# Altium PCB rsx_low_power_board.PcbDoc
Units mil, origin at the board's own origin, x right, y up, seen from the top; angles counter-clockwise.
Board outline 6000 x 4000 mil, 2 copper layers (Top Layer, Bottom Layer); 43 components, 15 nets, 113 pads, 16 vias.
Unrouted connection lines stored in the file: 14.
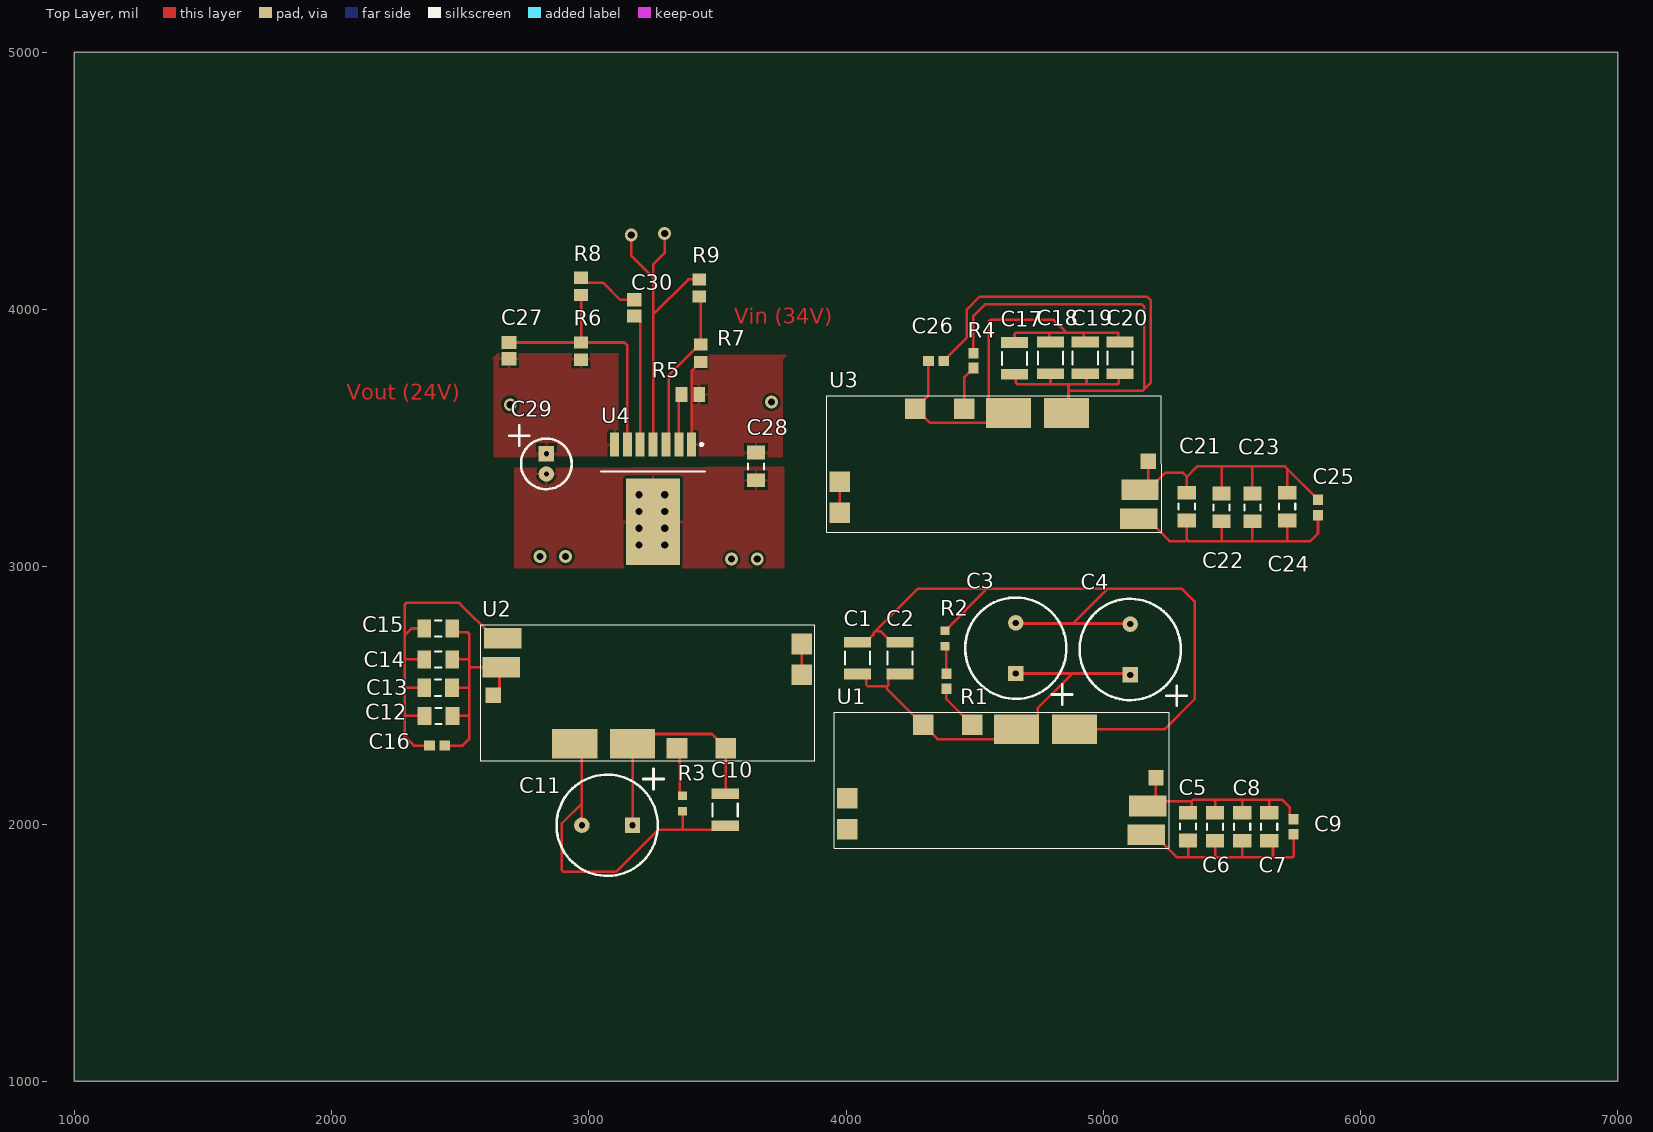
[diagram p0: Top Layer view]
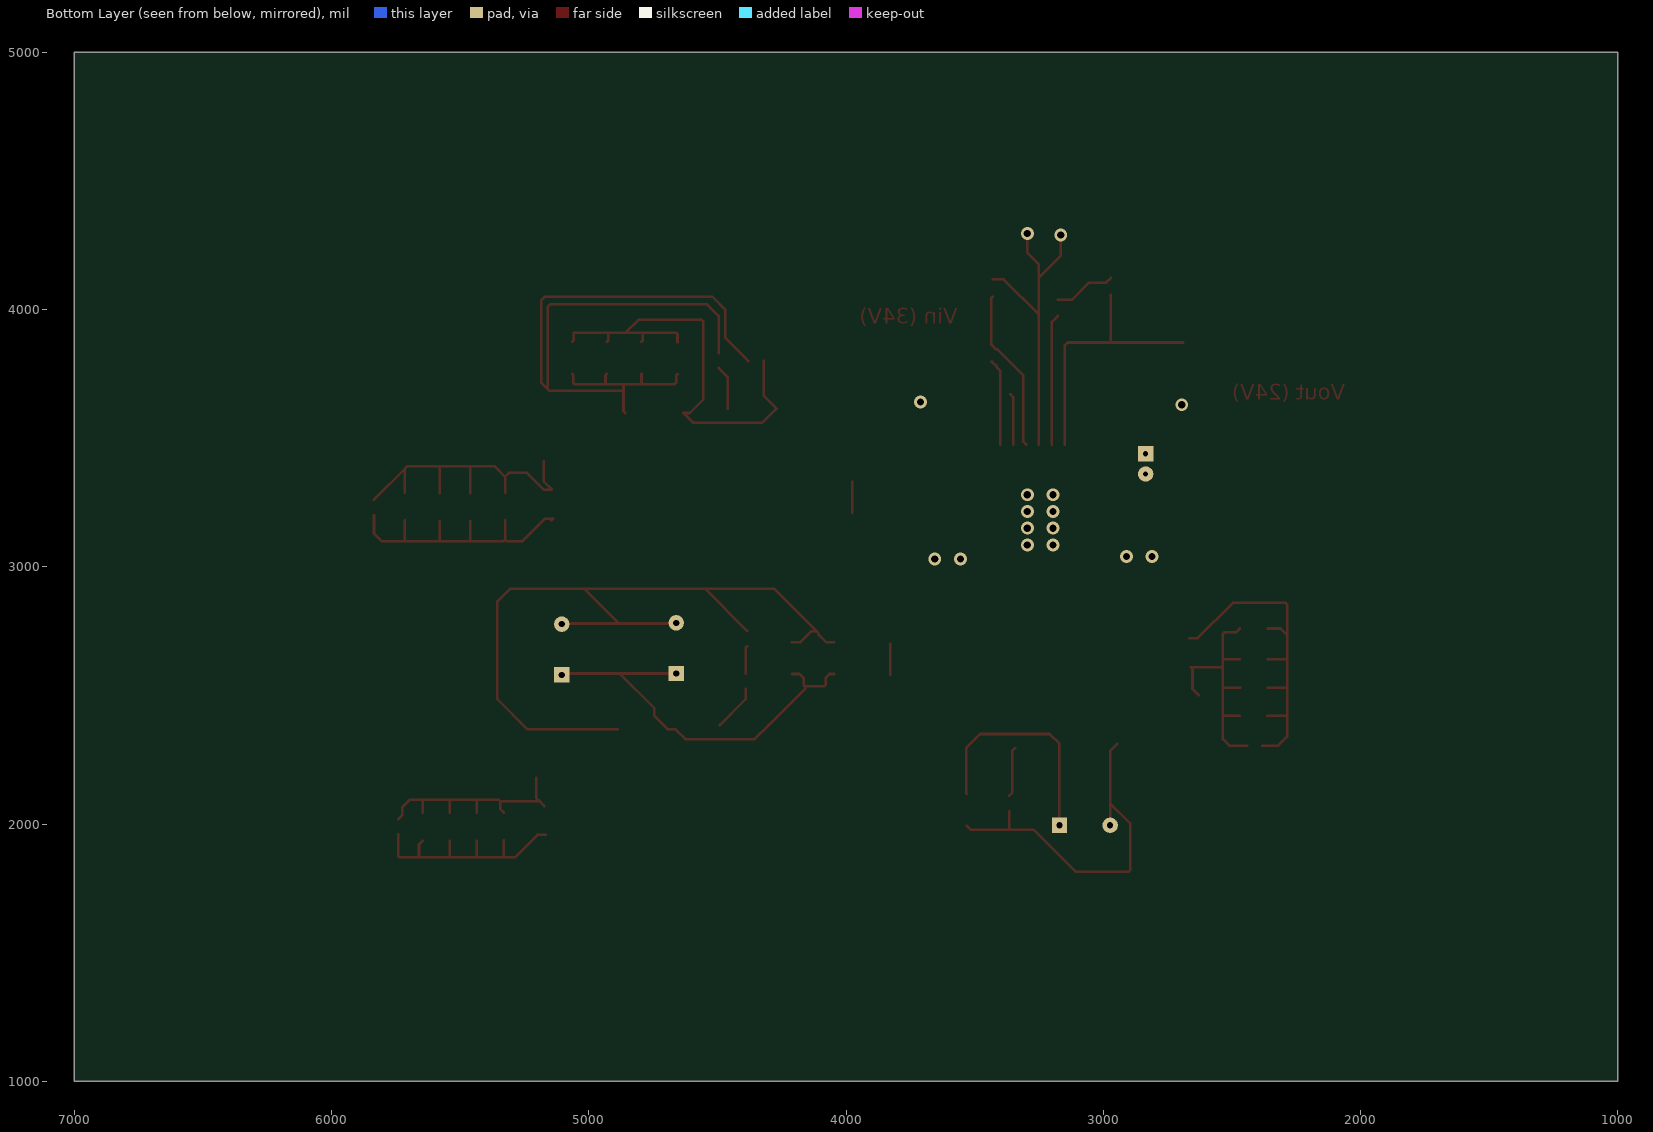
[diagram p1: Bottom Layer view, seen from below]

## Layer stack, top to bottom
Top Solder: solder mask 0.4, Solder Resist, Dk 3.5
Top Layer: signal copper 1.4
Dielectric 1: dielectric 12.6, FR-4, Dk 4.8
Bottom Layer: signal copper 1.4
Bottom Solder: solder mask 0.4, Solder Resist, Dk 3.5

## Board outline
1000,1000 7000,1000 7000,5000 1000,5000

## Design rules (kind name [scope] priority, off if disabled: settings)
Clearance [All] p1: gap=10 ignorepadtopadclearanceinfootprint=FALSE except(0: Arc-Hole Track-Hole SMDPad-Hole THPad-Hole Via-Hole Fill-Hole Poly-Hole Region-Hole Text-Hole)
PolygonConnect [All] p1: connectstyle=Relief reliefconductorwidth=10 reliefentries=4 polygonreliefangle="90 Angle" airgapwidth=10
RoutingVias [All] p1: holewidth=28 width=50 viastyle="Through Hole" minholewidth=28 minwidth=50 maxholewidth=28 maxwidth=50
SolderMaskExpansion [All] p1: expansion=4 istentingtop=FALSE
Width [All] p1: maxlimit=10 minlimit=10 preferedwidth=10
30 further rules are at their usual default settings.

## Components (designator, comment, footprint, x,y, rotation, side; value= is the part's Value field where it differs from the comment)
C1 "22uF" "22uF Capacitor" 4045,2645 r270 top
C2 "22uF" "22uF Capacitor" 4210,2645 r270 top
C3 "330uF" "330uF throught hole" 4660,2683.43 r270 top
C4 "330uF" "330uF throught hole" 5105,2678.43 r270 top
C5 "10uf" "10uF capacitor LPB" 5330,1990 r270 top
C6 "10uf" "10uF capacitor LPB" 5435,1989.13 r270 top
C7 "10uf" "10uF capacitor LPB" 5645,1989.13 r270 top
C8 "10uf" "10uF capacitor LPB" 5540,1989.13 r270 top
C9 "0.01uF" "0.01uF capacitor" 5740,1989.53 r270 top
C10 "22uF" "22uF Capacitor" 3530,2055 r90 top
C11 "330uF" "330uF throught hole" 3071.57,1995 r0 top
C12 "10uf" "10uF capacitor LPB" 2415.87,2420 r180 top
C13 "10uf" "10uF capacitor LPB" 2414.13,2530 r180 top
C14 "10uf" "10uF capacitor LPB" 2415,2640 r180 top
C15 "10uf" "10uF capacitor LPB" 2415,2760 r180 top
C16 "0.01uF" "0.01uF capacitor" 2410.47,2305 r180 top
C17 "22uF" "22uF Capacitor" 4655,3810 r90 top
C18 "22uF" "22uF Capacitor" 4795,3812.01 r90 top
C19 "22uF" "22uF Capacitor" 4930,3812.01 r90 top
C20 "22uF" "22uF Capacitor" 5065,3812.01 r90 top
C21 "10uf" "10uF capacitor LPB" 5325,3234.13 r270 top
C22 "10uf" "10uF capacitor LPB" 5460,3230.87 r270 top
C23 "10uf" "10uF capacitor LPB" 5580,3230.87 r270 top
C24 "10uf" "10uF capacitor LPB" 5715,3234.13 r270 top
C25 "0.01uF" "0.01uF capacitor" 5835,3230.47 r270 top
C26 "0.01uF" "0.01uF capacitor" 4350,3800 r180 top
C27 "0.022uF" "0.022uF Ceramic" 2690,3840 r270 top
C28 "10uf" "10uF capacitor LPB" 3650,3390 r270 top
C29 "33uF" "33uF Through hole Radical" 2835,3400 r90 top
C30 "4700 pF" "4700uF 0805" 3176.63,4006.5 r270 top
R1 "26.7KR" "26.7KR Resistor" 4390,2555 r270 top
R2 "16.2 KOhm" "16.2 KOhm Resistor" 4385,2721.46 r270 top
R3 "16.2 KOhm" "16.2 KOhm Resistor" 3365,2080 r90 top
R4 "6.19 KOhm" "6.19KOhm Resistor" 4495,3801.46 r270 top
R5 "499 KOhm" "499KOhm RG2012" 3395,3670 r180 top
R6 "34KOhm" "34 KOhm Resistor ERA-6A" 2970,3838.46 r270 top
R7 "1.18 KOhm" "34 KOhm Resistor ERA-6A" 3435,3830 r90 top
R8 "1.18 KOhm" "34 KOhm Resistor ERA-6A" 2970,4090 r270 top
R9 "1.18 KOhm" "34 KOhm Resistor ERA-6A" 3430,4083.46 r270 top
U1 "APXW012A0X3-SRZ_1" "DC-DC Buck converter" 3954.96,1905.08 r0 top
U2 "APXW012A0X3-SRZ_1" "DC-DC Buck converter" 3878.11,2774.96 r180 top
U3 "APXW012A0X3-SRZ_1" "DC-DC Buck converter" 3924.96,3135.08 r0 top
U4 "LMZ14203HTZX/NOPB" "24V DC to DC buck" 3256,3259.76 r270 top

## Footprints (in the part's own frame and the unit in brackets; to place one, negate y for a bottom-side part, rotate by r counter-clockwise, add the part's x,y. Pads: shape width x height; smd on the part's side, far side on the other; paste and mask are expansions set on the pad)
"0.01uF capacitor" [mm] "Chip Capacitor, 2-Leads, Body 1,60x0,80mm, IPC Medium Density"
  rect 1.05x1 smd: 1(-0.75,0) 2(0.75,0)
  body extent -0.88,-0.48 0.87,0.47, height 0.87
"0.022uF Ceramic" [mm] "Chip Capacitor, 2-Leads, Body 2,00x1,25mm, IPC Medium Density"
  rect 1.3x1.45 smd: 1(-0.8,0) 2(0.8,0)
  body extent -1.1,-0.72 1.1,0.72, height 0.88
"6.19KOhm Resistor" [mm] "Chip Resistor, 2-Leads, Body 1,60x0,80mm, IPC Medium Density"
  rect 1.05x1 smd: 1(-0.725,0) 2(0.725,0)
  body extent -0.9,-0.5 0.9,0.5, height 0.55
"10uF capacitor LPB" [mm] "Chip Capacitor, 2-Leads, Body 3,20x1,60mm, IPC Medium Density"
  rect 1.35x1.8 smd: 1(-1.375,0) 2(1.375,0)
  silkscreen extent -0.3,-0.8 0.3,0.8, body extent -1.7,-0.9 1.7,0.9, height 1.8
"16.2 KOhm Resistor" [mm] "Chip Resistor, 2-Leads, Body 1,60x0,80mm, IPC Medium Density"
  rect 0.85x0.9 smd: 1(-0.775,0) 2(0.775,0)
  body extent -0.85,-0.45 0.85,0.45, height 0.55
"22uF Capacitor" [mm] "Chip Capacitor, 2-Leads, Body 3,20x2,50mm, IPC Medium Density"
  rect 1.05x2.7 smd: 1(-1.575,0) 2(1.575,0)
  silkscreen extent -0.65,-1.25 0.65,1.25, body extent -1.75,-1.35 1.75,1.35, height 2.7
"24V DC to DC buck" [mm]
  rrect11% 2.41x0.89 smd: 1(-5.477,3.658) 2(-5.477,2.388) 3(-5.477,1.118) 4(-5.477,-0.152) 5(-5.477,-1.422) 6(-5.477,-2.692) 7(-5.477,-3.962)
  rrect2% 8.54x5.35 smd: 8(2.153,-0.152)
  silkscreen extent -5.6,-5.3 -2.83,5, body extent -2.68,-5.35 7.42,5.05, height 4.67
"26.7KR Resistor" [mm] "Chip Resistor, 2-Leads, Body 1,60x0,80mm, IPC Medium Density"
  rect 1.05x1 smd: 1(-0.725,0) 2(0.725,0)
  body extent -0.9,-0.5 0.9,0.5, height 0.55
"33uF Through hole Radical" [mil]
  rect 60x60 hole 19.68: 1(39.37,0)
  round 60 hole 19.68: 2(-39.37,0)
  silkscreen extent -98,-98 149,144
"34 KOhm Resistor ERA-6A" [mm] "Chip Resistor, 2-Leads, Body 2,00x1,25mm, IPC Medium Density"
  rect 1.2x1.35 smd: 1(-0.85,0) 2(0.85,0)
  body extent -1.1,-0.67 1.1,0.67, height 0.6
"330uF throught hole" [mil]
  rect 60x60 hole 23.62: 1(98.43,0)
  round 60 hole 23.62: 2(-98.43,0)
  silkscreen extent -197,-197 219,219
"499KOhm RG2012" [mm] "Chip Resistor, 2-Leads, Body 2,00x1,25mm, IPC Medium Density"
  rect 1.15x1.45 smd: 1(-0.875,0) 2(0.875,0)
  body extent -1.1,-0.72 1.1,0.72, height 0.5
"4700uF 0805" [mm] "Chip Capacitor, 2-Leads, Body 2,00x1,25mm, IPC Medium Density"
  rect 1.3x1.45 smd: 1(-0.8,0) 2(0.8,0)
  body extent -1.1,-0.72 1.1,0.72, height 0.88
"DC-DC Buck converter" [mm]
  rect 2.03x2.03 smd: 1(1.27,1.91) 2(1.27,4.95) 3(8.76,12.19) 4(13.59,12.19)
  rect 4.45x2.92 smd: 2(23.69,11.75) 5(17.97,11.75)
  rect 3.68x2.03 smd: 2(30.94,4.19) 7(30.8,1.33)
  rect 1.52x1.52 smd: 6(31.75,6.99)
  silkscreen extent 0,0 33.02,13.46, body extent 0.08,-0.01 33.1,13.44, height 10

## Part data
C1 C2 C10 C17 C18 C19 C20: library part GRM32ER71E226KE15L, "Cap Ceramic 22uF 25V X7R 10% SMD 1210 125C Embossed T/R", Case/Package=1210, Case Code (Metric)=3225, Dielectric=X7R, Manufacturer 1=Murata, Max Operating Temperature=125°C, Min Operating Temperature=-55°C, Package Quantity=1, Supplier Part Number 1=490-5313-6-ND, Tolerance=10%, Voltage=25V, Capacitance=22uF, Case Code (Imperial)=1210, Category=Capacitor, ComponentLink1Description=https://datasheet.ciiva.com/6072/1697714-6072768.pdf?src-supplier=Farnell, ComponentLink1URL=https://datasheet.ciiva.com/6072/1697714-6072768.pdf?src-supplier=Farnell, ComponentLink2Description=https://datasheet.ciiva.com/16497/product-16497009.pdf?src-supplier=Future+Electronics, ComponentLink2URL=https://datasheet.ciiva.com/16497/product-16497009.pdf?src-supplier=Future+Electronics, ComponentLink3Description=https://datasheet.ciiva.com/3776/2741grm32er71e226ke1523-3776996.pdf?src-supplier=Arrow, ComponentLink3URL=https://datasheet.ciiva.com/3776/2741grm32er71e226ke1523-3776996.pdf?src-supplier=Arrow, ComponentLink4Description=https://datasheet.ciiva.com/11789/0900766b80ef921d-11789129.pdf?src-supplier=RSComponents, ComponentLink4URL=https://datasheet.ciiva.com/11789/0900766b80ef921d-11789129.pdf?src-supplier=RSComponents, ComponentLink5Description=https://datasheet.ciiva.com/29201/451826-da-01-de-vs-kondens-grm32-er71e-226ke15l-29201795.pdf?src-supplier=Conrad, ComponentLink5URL=https://datasheet.ciiva.com/29201/451826-da-01-de-vs-kondens-grm32-er71e-226ke15l-29201795.pdf?src-supplier=Conrad, ComponentLink6Description=https://datasheet.ciiva.com/175/partnumbering-e-01-175746.pdf?src-supplier=Digi-Key, ComponentLink6URL=https://datasheet.ciiva.com/175/partnumbering-e-01-175746.pdf?src-supplier=Digi-Key, ComponentLink7Description=https://datasheet.ciiva.com/175/partnumbering-e-01-175747.pdf?src-supplier=Digi-Key, ComponentLink7URL=https://datasheet.ciiva.com/175/partnumbering-e-01-175747.pdf?src-supplier=Digi-Key, ComponentLink8Description=https://datasheet.ciiva.com/175/partnumbering-e-01-175748.pdf?src-supplier=Digi-Key, ComponentLink8URL=https://datasheet.ciiva.com/175/partnumbering-e-01-175748.pdf?src-supplier=Digi-Key, ComponentLink9Description=https://datasheet.ciiva.com/22703/1697714-22703397.pdf?src-supplier=Element14, ComponentLink9URL=https://datasheet.ciiva.com/22703/1697714-22703397.pdf?src-supplier=Element14, Depth=2.5mm, Height=2.5mm, Lead Free="Lead Free", Length=3.2mm, Manufacturer Part Number 1=GRM32ER71E226KE15L, Material=Ceramic, Mount="Surface Mount", Number of Pins=2, Packaging="Tape and Reel", Pricing 1="1=1,78000, 10=1,40600, 100=1,05410, 500=0,79646 (USD)", Radiation Hardening=No, REACH SVHC="No SVHC", RoHS=Yes, Stock 1=52660, Supplier 1=Digi-Key, Termination=SMD/SMT, Thickness=0.106inch, Voltage Rating=25V, Voltage Rating (DC)=25V, Width=0.098inch
C3 C4 C11: library part 35ZLH330MEFCT810X12.5, "CAP ALUM 330UF 20% 35V RADIAL", Case/Package=Radial, Manufacturer 1=Rubycon, Max Operating Temperature=105°C, Min Operating Temperature=-40°C, Package Quantity=1000, Ripple Current=731.5mA, Supplier Part Number 1=1189-3752-1-ND, Tolerance=20%, Voltage Rating=35V, Capacitance=330uF, ComponentLink1Description=http://www.rubycon.co.jp/en/catalog/e_pdfs/aluminum/e_ZLH.pdf?src-supplier=Digi-Key, ComponentLink1URL=http://www.rubycon.co.jp/en/catalog/e_pdfs/aluminum/e_ZLH.pdf?src-supplier=Digi-Key, ComponentLink2Description=http://www.rubycon.co.jp/en/catalog/e_pdfs/aluminum/Radial_Lead_Alumi_Eng.pdf?src-supplier=Digi-Key, ComponentLink2URL=http://www.rubycon.co.jp/en/catalog/e_pdfs/aluminum/Radial_Lead_Alumi_Eng.pdf?src-supplier=Digi-Key, Height - Seated (Max)=0.551inch, Impedance=39mR, Lead Pitch=0.197inch, Life (Hours)=10000Hour, Manufacturer Part Number 1=35ZLH330MEFCT810X12.5, Mount="Through Hole", Packaging="Tape and Reel", Pricing 1="1=0,52000, 10=0,36900, 100=0,24280 (USD)", RoHS=Yes, Stock 1=14330, Supplier 1=Digi-Key
C5 C6 C7 C8 C12 C13 C14 C15 C21 C22 C23 C24 C28: library part GRT31CR61H106ME01L, "CAP CER 10UF 50V X5R 1206", Capacitance=10uF, Case/Package=1206, Case Code (Metric)=3216, Manufacturer 1=Murata, Max Operating Temperature=85°C, Min Operating Temperature=-55°C, Ratings=AEC-Q200, Supplier Part Number 1=490-12457-1-ND, Tolerance=20%, Voltage Rating=50V, Case Code (Imperial)=1206, Category=Capacitor, ComponentLink1Description=http://search.murata.co.jp/Ceramy/image/img/A01X/G101/ENG/GRT31CR61H106ME01-01.pdf?src-supplier=Digi-Key, ComponentLink1URL=http://search.murata.co.jp/Ceramy/image/img/A01X/G101/ENG/GRT31CR61H106ME01-01.pdf?src-supplier=Digi-Key, Length=0.126inch, Manufacturer Part Number 1=GRT31CR61H106ME01L, Mount="Surface Mount", Packaging="Tape and Reel", Pricing 1="1=0,50000, 10=0,34900, 100=0,20920, 500=0,15690, 1000=0,13249 (USD)", RoHS=Yes, Stock 1=8159, Supplier 1=Digi-Key, Thickness=0.071inch, Width=0.063inch
C9 C16 C25 C26: library part C0603C103KARACAUTO, "Cap Ceramic 0.01uF 250V X7R 10% Pad SMD 0603 125C Automotive T/R", Capacitance=10nF, Case/Package=0603, Case Code (Metric)=1608, Manufacturer 1=KEMET, Max Operating Temperature=125°C, Min Operating Temperature=-55°C, Ratings=AEC-Q200, Supplier Part Number 1=399-17960-1-ND, Tolerance=10%, Voltage Rating=250V, Case Code (Imperial)=0603, Category=Capacitor, ComponentLink1Description=https://api.kemet.com/component-edge/download/datasheet/C0603C103KARACAUTO.pdf?src-supplier=Digi-Key, ComponentLink1URL=https://api.kemet.com/component-edge/download/datasheet/C0603C103KARACAUTO.pdf?src-supplier=Digi-Key, Manufacturer Part Number 1=C0603C103KARACAUTO, Mount="Surface Mount", Packaging="Tape and Reel", Pricing 1="1=0,90000, 10=0,68500, 100=0,49040, 500=0,37964, 1000=0,32691 (USD)", RoHS=No, Stock 1=8483, Supplier 1=Digi-Key
C27: library part "0.022uF C0805C223K5RACTU", "KEMET - C0805C223K5RACTU - CAP, MLCC, X7R, 22NF, 50V, 0805", Capacitance=22nF, Case/Package=0805, Dielectric=X7R, Dielectric Material=Ceramic, Manufacturer 1=KEMET, Manufacturer Part Number 1=C0805C223K5RACTU, Max Operating Temperature=125°C, Min Operating Temperature=-55°C, Supplier Part Number 1=399-1163-1-ND, Tolerance=10%, Voltage=50V, ComponentLink1Description=https://datasheet.ciiva.com/18193/getdatasheetpartid-385695-18193669.pdf?src-supplier=Verical, ComponentLink1URL=https://datasheet.ciiva.com/18193/getdatasheetpartid-385695-18193669.pdf?src-supplier=Verical, Depth=1.25mm, Height=0.78mm, Length=2mm, Mount="Surface Mount", Packaging="Tape and Reel", Pricing 1="1=0,10000, 10=0,06000, 100=0,02670, 500=0,01906, 1000=0,01497 (USD)", Radiation Hardening=No, RoHS=Yes, Stock 1=516153, Supplier 1=Digi-Key, Voltage Rating (DC)=50V
C29: library part "33uF UFW1H330MDD1TD", "CAP ALUM 33UF 20% 50V RADIAL", Case/Package=Radial, Manufacturer 1=Nichicon, Manufacturer Part Number 1=UFW1H330MDD1TD, Max Operating Temperature=85°C, Min Operating Temperature=-40°C, Package Quantity=1, Ripple Current=120mA, Supplier Part Number 1=493-11010-1-ND, Tolerance=20%, Voltage Rating=50V, Capacitance=33uF, ComponentLink1Description=http://nichicon-us.com/english/products/pdfs/e-ufw.pdf?src-supplier=Digi-Key, ComponentLink1URL=http://nichicon-us.com/english/products/pdfs/e-ufw.pdf?src-supplier=Digi-Key, ComponentLink2Description=http://nichicon-us.com/english/products/pdfs/e-mi_tape.pdf?src-supplier=Digi-Key, ComponentLink2URL=http://nichicon-us.com/english/products/pdfs/e-mi_tape.pdf?src-supplier=Digi-Key, Height - Seated (Max)=0.492inch, Lead Pitch=0.079inch, Life (Hours)=2000Hour, Mount="Through Hole", Packaging="Tape and Reel", Pricing 1="1=0,23000, 10=0,16000, 100=0,09070, 500=0,06404, 1000=0,05603 (USD)", RoHS=Yes, Stock 1=4144, Supplier 1=Digi-Key
C30: library part "4700pF 0805", "KEMET - C0805C472K5RACTU - CERAMIC CAPACITOR 4700PF, 50V, X7R, 10%, 0805", Capacitance=4.7nF, Case/Package=0805, Case Code (Metric)=2012, Dielectric=X7R, Dielectric Material=Ceramic, Manufacturer 1=KEMET, Manufacturer Part Number 1=C0805C472K5RACTU, Max Operating Temperature=125°C, Min Operating Temperature=-55°C, Package Quantity=1, Supplier Part Number 1=399-1155-1-ND, Tolerance=10%, Voltage=50V, Case Code (Imperial)=0805, ComponentLink1Description=https://datasheet.ciiva.com/6074/kem-c1002-x7r-smd-6074679.pdf?src-supplier=Farnell, ComponentLink1URL=https://datasheet.ciiva.com/6074/kem-c1002-x7r-smd-6074679.pdf?src-supplier=Farnell, ComponentLink2Description=https://datasheet.ciiva.com/28682/1851736-28682318.pdf?src-supplier=Element14, ComponentLink2URL=https://datasheet.ciiva.com/28682/1851736-28682318.pdf?src-supplier=Element14, Contact Plating=Tin,Matte, Depth=1.25mm, Height=0.78mm, Length=2mm, Mount="Surface Mount", Number of Pins=2, Packaging="Tape and Reel", Pricing 1="1=0,10000, 10=0,06800, 100=0,03040, 500=0,02172, 1000=0,01706 (USD)", Radiation Hardening=No, REACH SVHC="No SVHC", RoHS=Yes, Stock 1=374666, Supplier 1=Digi-Key, Termination=SMD/SMT, Thickness=0.035inch, Voltage Rating=50V, Voltage Rating (DC)=50V, Weight=0.000194oz, Width=0.049inch
R1: library part ERA-3AEB2672V, "RES SMD 26.7KOHM 0.1% 1/10W 0603", Case/Package=0603, Case Code (Metric)=1608, Manufacturer 1=Panasonic, Max Operating Temperature=155°C, Max Power Dissipation=100mW, Min Operating Temperature=-55°C, Package Quantity=1, Resistance=26.7kR, Supplier Part Number 1=P26.7KDBCT-ND, Temperature Coefficient=25ppm/°C, Tolerance=0.1%, Voltage Rating=75V, Case Code (Imperial)=0603, ComponentLink1Description=https://datasheet.ciiva.com/11814/0900766b80eb1d8c-11814836.pdf?src-supplier=RSComponents, ComponentLink1URL=https://datasheet.ciiva.com/11814/0900766b80eb1d8c-11814836.pdf?src-supplier=RSComponents, ComponentLink2Description=https://datasheet.ciiva.com/5987/485442-5987192.pdf?src-supplier=Farnell, ComponentLink2URL=https://datasheet.ciiva.com/5987/485442-5987192.pdf?src-supplier=Farnell, ComponentLink3Description=https://datasheet.ciiva.com/5987/485442-5987183.pdf?src-supplier=Farnell, ComponentLink3URL=https://datasheet.ciiva.com/5987/485442-5987183.pdf?src-supplier=Farnell, ComponentLink4Description=https://datasheet.ciiva.com/46422/485442-46422629.pdf?src-supplier=Element14, ComponentLink4URL=https://datasheet.ciiva.com/46422/485442-46422629.pdf?src-supplier=Element14, ComponentLink5Description=https://datasheet.ciiva.com/17210/aoa0000ce26-17210681.pdf?src-supplier=Avnet+Europe, ComponentLink5URL=https://datasheet.ciiva.com/17210/aoa0000ce26-17210681.pdf?src-supplier=Avnet+Europe, Composition="Thin Film,Metal Film", Contact Plating=Tin, Depth=0.8mm, Features="Automotive AEC-Q200", Height=0.45mm, Lead Free="Lead Free", Length=1.6mm, Manufacturer Part Number 1=ERA-3AEB2672V, Mount="Surface Mount", Number of Pins=2, Number of Terminations=2, Packaging="Tape and Reel", Power Rating=100mW, Pricing 1="1=0,35000, 10=0,30000, 100=0,11720, 1000=0,04906, 2500=0,04498 (USD)", Radiation Hardening=No, REACH SVHC="No SVHC", RoHS=Yes, Stock 1=17260, Supplier 1=Digi-Key, Voltage Rating (DC)=75V, Width=0.8mm
R2 R3: library part RT0603DRD0716K2L, "RES SMD 16.2KOHM 0.5% 1/10W 0603", Case/Package=0603, Case Code (Metric)=1608, Manufacturer 1=Yageo, Max Operating Temperature=155°C, Max Power Dissipation=100mW, Min Operating Temperature=-55°C, Package Quantity=1, Resistance=16.2kR, Supplier Part Number 1=311-16.2KDCT-ND, Temperature Coefficient=25ppm/°C, Tolerance=0.5%, Voltage Rating (DC)=50V, Case Code (Imperial)=0603, Category=Resistors, ComponentLink1Description=http://www.yageo.com/documents/recent/PYu-RT_1-to-0.01_RoHS_L_8.pdf?src-supplier=Digi-Key, ComponentLink1URL=http://www.yageo.com/documents/recent/PYu-RT_1-to-0.01_RoHS_L_8.pdf?src-supplier=Digi-Key, Composition="Thin Film", Features="Moisture Resistant", Height=0.022inch, Lead Free="Lead Free", Length=0.063inch, Manufacturer Part Number 1=RT0603DRD0716K2L, Number of Terminations=2, Packaging="Tape and Reel", Pricing 1="1=0,20000, 10=0,16800, 100=0,06570, 1000=0,02750, 2500=0,02521 (USD)", RoHS=Yes, Stock 1=8163, Supplier 1=Digi-Key, Width=0.031inch
R4: library part ERA3AEB6191V, "RES SMD 6.19KOHM 0.1% 1/10W 0603", Case/Package=0603, Case Code (Metric)=1608, Manufacturer 1=Panasonic, Max Operating Temperature=155°C, Max Power Dissipation=100mW, Min Operating Temperature=-55°C, Package Quantity=1, Resistance=6.19kR, Supplier Part Number 1=P6.19KDBCT-ND, Temperature Coefficient=25ppm/°C, Tolerance=0.1%, Voltage Rating=75V, Case Code (Imperial)=0603, ComponentLink1Description=https://datasheet.ciiva.com/11809/0900766b80eb1d8c-11809038.pdf?src-supplier=RSComponents, ComponentLink1URL=https://datasheet.ciiva.com/11809/0900766b80eb1d8c-11809038.pdf?src-supplier=RSComponents, ComponentLink2Description=https://datasheet.ciiva.com/5971/485442-5971798.pdf?src-supplier=Farnell, ComponentLink2URL=https://datasheet.ciiva.com/5971/485442-5971798.pdf?src-supplier=Farnell, ComponentLink3Description=https://datasheet.ciiva.com/24026/aoa0000ce26-32660-24026983.pdf?src-supplier=Mouser, ComponentLink3URL=https://datasheet.ciiva.com/24026/aoa0000ce26-32660-24026983.pdf?src-supplier=Mouser, ComponentLink4Description=https://datasheet.ciiva.com/46447/485442-46447114.pdf?src-supplier=Element14, ComponentLink4URL=https://datasheet.ciiva.com/46447/485442-46447114.pdf?src-supplier=Element14, ComponentLink5Description=https://datasheet.ciiva.com/43457/485442-43457243.pdf?src-supplier=Farnell, ComponentLink5URL=https://datasheet.ciiva.com/43457/485442-43457243.pdf?src-supplier=Farnell, ComponentLink6Description=https://datasheet.ciiva.com/46447/485442-46447115.pdf?src-supplier=Element14, ComponentLink6URL=https://datasheet.ciiva.com/46447/485442-46447115.pdf?src-supplier=Element14, ComponentLink7Description=https://datasheet.ciiva.com/41450/001180853-da-01-en-widerstand-era-0603-6k19-0-1-5000st-41450170.pdf?src-supplier=Conrad, ComponentLink7URL=https://datasheet.ciiva.com/41450/001180853-da-01-en-widerstand-era-0603-6k19-0-1-5000st-41450170.pdf?src-supplier=Conrad, Composition="Metal Film,Thin Film", Contact Plating=Tin, Depth=0.8mm, Features="Automotive AEC-Q200", Height=0.45mm, Lead Free="Lead Free", Length=1.6mm, Manufacturer Part Number 1=ERA3AEB6191V, Military Standard=Not, Mount="Surface Mount", Number of Pins=2, Number of Terminations=2, Packaging="Tape and Reel", Power Rating=100mW, Pricing 1="1=0,35000, 10=0,30000, 100=0,11720, 1000=0,04906, 2500=0,04498 (USD)", Radiation Hardening=No, REACH SVHC="No SVHC", RoHS=Yes, Stock 1=26110, Supplier 1=Digi-Key, Voltage Rating (DC)=75V, Width=0.8mm
R5: library part RG2012P-4993-B-T5, "RES SMD 499K OHM 0.1% 1/8W 0805", Case/Package=0805, Case Code (Metric)=2012, Manufacturer 1=Susumu, Max Operating Temperature=155°C, Min Operating Temperature=-55°C, Power Rating=125mW, Resistance=499kR, Supplier Part Number 1=RG20P499KBCT-ND, Temperature Coefficient=25ppm/°C, Tolerance=0.1%, Voltage Rating=150V, Case Code (Imperial)=0805, ComponentLink1Description=https://datasheet.ciiva.com/5624/rg-rm-rgh-datasheet-5624071.pdf?src-supplier=Mouser, ComponentLink1URL=https://datasheet.ciiva.com/5624/rg-rm-rgh-datasheet-5624071.pdf?src-supplier=Mouser, Composition="Thin Film", Height=0.4mm, Lead Free="Lead Free", Length=2mm, Manufacturer Part Number 1=RG2012P-4993-B-T5, Packaging="Tape and Reel", Pricing 1="1=0,41000, 10=0,31800, 100=0,13360, 1000=0,07374, 2500=0,06913 (USD)", RoHS=Yes, Stock 1=27646, Supplier 1=Digi-Key, Termination=SMD/SMT, Voltage Rating (DC)=150V, Weight=0.000194oz, Width=1.2mm
R6: library part ERA6AEB3402V, "RES SMD 34K OHM 0.1% 1/8W 0805", Case/Package=0805, Case Code (Metric)=2012, Manufacturer 1=Panasonic, Max Operating Temperature=155°C, Max Power Dissipation=125mW, Min Operating Temperature=-55°C, Package Quantity=5000, Resistance=34kR, Supplier Part Number 1=P34KDACT-ND, Temperature Coefficient=25ppm/°C, Tolerance=0.1%, Voltage Rating=200V, Voltage Rating (DC)=100V, Case Code (Imperial)=0805, ComponentLink1Description=https://datasheet.ciiva.com/11815/0900766b80eb1d8c-11815791.pdf?src-supplier=RSComponents, ComponentLink1URL=https://datasheet.ciiva.com/11815/0900766b80eb1d8c-11815791.pdf?src-supplier=RSComponents, ComponentLink2Description=https://datasheet.ciiva.com/41450/001181326-da-01-en-widerstand-era-0805-34k0-0-1-5000st-41450489.pdf?src-supplier=Conrad, ComponentLink2URL=https://datasheet.ciiva.com/41450/001181326-da-01-en-widerstand-era-0805-34k0-0-1-5000st-41450489.pdf?src-supplier=Conrad, ComponentLink3Description=https://datasheet.ciiva.com/9190/aoa0000ce26-9190487.pdf?src-supplier=Avnet, ComponentLink3URL=https://datasheet.ciiva.com/9190/aoa0000ce26-9190487.pdf?src-supplier=Avnet, ComponentLink4Description=https://datasheet.ciiva.com/17210/aoa0000ce26-17210191.pdf?src-supplier=Avnet+Europe, ComponentLink4URL=https://datasheet.ciiva.com/17210/aoa0000ce26-17210191.pdf?src-supplier=Avnet+Europe, ComponentLink5Description=https://datasheet.ciiva.com/22705/485442-22705221.pdf?src-supplier=Element14, ComponentLink5URL=https://datasheet.ciiva.com/22705/485442-22705221.pdf?src-supplier=Element14, ComponentLink6Description=https://datasheet.ciiva.com/6052/485442-6052790.pdf?src-supplier=Farnell, ComponentLink6URL=https://datasheet.ciiva.com/6052/485442-6052790.pdf?src-supplier=Farnell, ComponentLink7Description=https://datasheet.ciiva.com/7870/485442-7870667.pdf?src-supplier=Element14, ComponentLink7URL=https://datasheet.ciiva.com/7870/485442-7870667.pdf?src-supplier=Element14, ComponentLink8Description=https://datasheet.ciiva.com/7870/485442-7870668.pdf?src-supplier=Element14, ComponentLink8URL=https://datasheet.ciiva.com/7870/485442-7870668.pdf?src-supplier=Element14, Composition="Metal Film,Thin Film", Contact Plating=Tin, Depth=1.25mm, Features="Automotive AEC-Q200", Height=0.5mm, Lead Free="Lead Free", Length=2mm, Manufacturer Part Number 1=ERA6AEB3402V, Military Standard=Not, Mount="Surface Mount", Number of Pins=2, Number of Terminations=2, Packaging="Tape and Reel", Power Rating=125mW, Pricing 1="1=0,36000, 10=0,30200, 100=0,11820, 1000=0,04948, 2500=0,04536 (USD)", Radiation Hardening=No, REACH SVHC="No SVHC", RoHS=Yes, Stock 1=7057, Supplier 1=Digi-Key, Termination=SMD/SMT, Width=1.25mm
R7 R8 R9: library part ERA-6AEB1181V, "RES SMD 1.18K OHM 0.1% 1/8W 0805", Case/Package=0805, Case Code (Metric)=2012, Manufacturer 1=Panasonic, Max Operating Temperature=155°C, Max Power Dissipation=125mW, Min Operating Temperature=-55°C, Package Quantity=1, Resistance=1.18kR, Supplier Part Number 1=P1.18KDACT-ND, Temperature Coefficient=25ppm/°C, Tolerance=0.1%, Voltage Rating=100V, Case Code (Imperial)=0805, ComponentLink1Description=https://datasheet.ciiva.com/11811/0900766b80eb1d8c-11811515.pdf?src-supplier=RSComponents, ComponentLink1URL=https://datasheet.ciiva.com/11811/0900766b80eb1d8c-11811515.pdf?src-supplier=RSComponents, ComponentLink2Description=https://datasheet.ciiva.com/26335/459360-da-01-en-widerstand-0805-era-26335818.pdf?src-supplier=Conrad, ComponentLink2URL=https://datasheet.ciiva.com/26335/459360-da-01-en-widerstand-0805-era-26335818.pdf?src-supplier=Conrad, ComponentLink3Description=https://datasheet.ciiva.com/7911/485442-7911589.pdf?src-supplier=Element14, ComponentLink3URL=https://datasheet.ciiva.com/7911/485442-7911589.pdf?src-supplier=Element14, ComponentLink4Description=https://datasheet.ciiva.com/7911/485442-7911590.pdf?src-supplier=Element14, ComponentLink4URL=https://datasheet.ciiva.com/7911/485442-7911590.pdf?src-supplier=Element14, ComponentLink5Description=https://datasheet.ciiva.com/5870/485442-5870600.pdf?src-supplier=Farnell, ComponentLink5URL=https://datasheet.ciiva.com/5870/485442-5870600.pdf?src-supplier=Farnell, ComponentLink6Description=https://datasheet.ciiva.com/5870/485442-5870601.pdf?src-supplier=Farnell, ComponentLink6URL=https://datasheet.ciiva.com/5870/485442-5870601.pdf?src-supplier=Farnell, ComponentLink7Description=https://datasheet.ciiva.com/9198/aoa0000ce26-9198586.pdf?src-supplier=Avnet, ComponentLink7URL=https://datasheet.ciiva.com/9198/aoa0000ce26-9198586.pdf?src-supplier=Avnet, ComponentLink8Description=https://datasheet.ciiva.com/5870/485442-5870603.pdf?src-supplier=Farnell, ComponentLink8URL=https://datasheet.ciiva.com/5870/485442-5870603.pdf?src-supplier=Farnell, Composition="Metal Film,Thin Film", Contact Plating=Tin, Depth=1.25mm, Features="Automotive AEC-Q200", Height=0.5mm, Lead Free="Lead Free", Length=2mm, Manufacturer Part Number 1=ERA-6AEB1181V, Mount="Surface Mount", Number of Pins=2, Number of Terminations=2, Packaging="Tape and Reel", Power Rating=125mW, Pricing 1="1=0,36000, 10=0,30200, 100=0,11820, 1000=0,04948, 2500=0,04536 (USD)", Radiation Hardening=No, RoHS=Yes, Stock 1=9011, Supplier 1=Digi-Key, Termination=SMD/SMT, Voltage Rating (DC)=100V, Width=1.25mm
U1 U2 U3: "DC DC CONVERTER 3-18V 12A", Case/Package=Module, Current - Output 1=12A, Manufacturer 1=GE, Manufacturer Part Number 1=APXW012A0X3-SRZ, Max Input Voltage=36V, Max Operating Temperature=85°C, Min Input Voltage=9V, Min Operating Temperature=-40°C, Output Voltage=18V, Package Quantity=140, Supplier Part Number 1=150028492, Category="Buck Converter", ComponentLink1Description=http://apps.geindustrial.com/publibrary/checkout/DS-APXW012?TNR=Data%20Sheets&src-supplier=Avnet, ComponentLink1URL=http://apps.geindustrial.com/publibrary/checkout/DS-APXW012?TNR=Data%20Sheets&src-supplier=Avnet, ComponentLink2Description=http://apps.geindustrial.com/publibrary/checkout/DS-APXW012?TNR=Data%20Sheets|DS-APXW012|generic&src-supplier=Digi-Key, ComponentLink2URL=http://apps.geindustrial.com/publibrary/checkout/DS-APXW012?TNR=Data%20Sheets|DS-APXW012|generic&src-supplier=Digi-Key, ComponentLink3Description=http://apps.geindustrial.com/publibrary/checkout/DS-APXW012?TNR=Data%20Sheets%7CDS-APXW012%7Cgeneric&src-supplier=Mouser, ComponentLink3URL=http://apps.geindustrial.com/publibrary/checkout/DS-APXW012?TNR=Data%20Sheets%7CDS-APXW012%7Cgeneric&src-supplier=Mouser, Efficiency=95.5%, Features=OCP,OTP, Height=0.39inch, Length=1.3inch, Max Output Current=12A, Mount="Surface Mount", Number of Outputs=1, Number of Pins=9, Output Current=12A, Packaging="Tape and Reel", RoHS=Yes, Stock 1=0, Supplier 1=Avnet, Voltage - Output 1=18V, Width=0.53inch
U4: "IC BUCK SYNC ADJ 3A TO-PMOD-7", Manufacturer 1="TI National Semiconductor", Max Input Voltage=42V, Max Operating Temperature=125°C, Max Output Current=3A, Max Power Dissipation=90W, Min Input Voltage=6V, Min Operating Temperature=-40°C, Output Voltage=5V, Package Quantity=500, Supplier Part Number 1=296-43602-1-ND, Switching Frequency=1MHz, Voltage - Output 1=30V, ComponentLink1Description=http://components.arrow.com/part/dataview/56275422S8868331N1317?src-supplier=Arrow, ComponentLink1URL=http://components.arrow.com/part/dataview/56275422S8868331N1317?src-supplier=Arrow, ComponentLink2Description=http://components.arrow.com/part/dataview/0323_03165962?src-supplier=Arrow+Europe, ComponentLink2URL=http://components.arrow.com/part/dataview/0323_03165962?src-supplier=Arrow+Europe, ComponentLink3Description=http://www.ti.com/general/docs/lit/getliterature.tsp?genericPartNumber=LMZ14203H&&fileType=pdf&src-supplier=Avnet, ComponentLink3URL=http://www.ti.com/general/docs/lit/getliterature.tsp?genericPartNumber=LMZ14203H&&fileType=pdf&src-supplier=Avnet, ComponentLink4Description=http://www.ti.com/general/docs/lit/getliterature.tsp?genericPartNumber=LMZ14203H&amp;&amp;fileType=pdf&src-supplier=Avnet+Asia, ComponentLink4URL=http://www.ti.com/general/docs/lit/getliterature.tsp?genericPartNumber=LMZ14203H&amp;&amp;fileType=pdf&src-supplier=Avnet+Asia, ComponentLink5Description=http://www.ti.com/lit/pdf/snaa214?src-supplier=Digi-Key, ComponentLink5URL=http://www.ti.com/lit/pdf/snaa214?src-supplier=Digi-Key, ComponentLink6Description=http://www.ti.com/lit/ds/symlink/lmz14203h.pdf?src-supplier=Digi-Key, ComponentLink6URL=http://www.ti.com/lit/ds/symlink/lmz14203h.pdf?src-supplier=Digi-Key, ComponentLink7Description=http://www.ti.com/lit/gpn/lmz14203h?src-supplier=Mouser, ComponentLink7URL=http://www.ti.com/lit/gpn/lmz14203h?src-supplier=Mouser, Contact Plating=Tin,Matte, Depth=9.85mm, Efficiency=97%, Features=UVLO, Height=0.18inch, Isolation=Non-Isolated, Lead Free="Lead Free", Length=0.4inch, Manufacturer Part Number 1=LMZ14203HTZX/NOPB, Mount="Surface Mount", Number of Outputs=1, Number of Pins=7, Output Current=3A, Packaging="Tape and Reel", Pricing 1="1=12,71000, 5=12,61600, 10=12,52000, 25=12,32720, 50=11,94180, 100=10,78620, 250=10,59356 (USD)", RoHS=Yes, Stock 1=794, Supplier 1=Digi-Key, Width=0.54inch

## Via types
v1: diameter 50, hole 28, Top Layer to Bottom Layer, 16 vias

## Nets (pads, with @x,y where several pads share a name; then routed paths per layer and width w, separated by ;. In a path a pad name is that pad's centre, name@x,y a point inside that pad or via, vN(x,y) a via of type N, cw(c..) or ccw(c..) an arc to the next point about the centre after c; other vN are vias at no path point)
24V: C27.2 C29.1 R6.2 U4.7
37V: C28.1 R5.1 R7.1 U4.1 | length 337.4
  Top Layer w10: U4.1 3400,3761.54 3413.43,3774.96 3413.43,3777.91 3432.05,3796.54 R7.1
CI1: C5.2 C6.2 C7.2 C8.2 C9.2 C12.2 C13.2 C14.2 C15.2 C16.2 C21.2 C22.2 C23.2 C24.2 C25.2 U1.7 U2.7 U3.7 | length 3490.4
  Top Layer w10: C13.2 2290,2530 2285,2535 ; C14.2 2290,2640 2285,2645 ; C15.2 2310,2760 2285,2735 ; C12.2 2285,2420 ; C16.2 2320,2305 2285,2340 2285,2420 ; U2.7 2633.03,2722.6 2495.63,2860 2290.86,2860 2285,2854.14 2285,2735 ; U3.7@5145,3180 U3.7 5170.04,3187.44 5257.48,3100 5319.14,3100 5325,3105.86 ; U1.7 5200.04,1957.44 5287.48,1870 5335.86,1870 ; C21.2 5325,3105.86 ; C5.2 5330,1875.86 5335.86,1870 ; C6.2 5435,1875 5440,1870 ; C22.2 5460,3100 ; C8.2 5540,1870 ; C23.2 5580,3100 ; C7.2 5660,1920 5660,1870 ; C24.2 5715,3100 ; C9.2 5740,1885 5740.86,1884.14 5740.86,1875.86 5735,1870 5660,1870 ; C25.2 5835,3130 5805,3100 5715,3100 ; 2285,2420 2285,2535 ; 2285,2535 2285,2645 ; 2285,2645 2285,2735 ; 5325,3105.86 5330.86,3100 5460,3100 ; 5335.86,1870 5440,1870 ; 5440,1870 5540,1870 ; 5460,3100 5580,3100 ; 5540,1870 5660,1870 ; 5580,3100 5715,3100
CO2: C1.1 C2.1 C3.2 C4.2 C5.1 C6.1 C7.1 C8.1 C9.1 C10.1 C11.2 C12.1 C13.1 C14.1 C15.1 C16.1 C17.1 C18.1 C19.1 C20.1 C21.1 C22.1 C23.1 C24.1 C25.1 C26.1 C28.2 C29.2 C30.1 R2.1 R3.1 R4.1 R8.1 R9.1 U1.1 U1.2 U1.6 U2.1 U2.2 U2.6 U3.1 U3.2 U3.6 U4.4 U4.8 | length 13179.8
  Top Layer w10: C16.1 2510,2305 2535,2330 2535,2425 ; C13.1 2535,2530 ; C14.1 2530,2640 2535,2645 ; C15.1 2484.13,2745 2529.14,2745 2535,2739.14 2535,2645 ; C12.1 2530,2420 2535,2425 ; U2.6 2653.03,2524.68 2653.03,2603.03 2660,2610 2535,2610 ; U2.2@2945.43,2312.36 2973.15,2284.65 2973.15,2080 ; R8.1 2988.62,4104.84 3054.92,4104.84 3121.77,4037.99 C30.1 ; C11.2 2973.15,2080 ; v1(3165,4290) 3165,4210 3250,4125 ; U4.4 3250,3980 ; v1(3295,4295) 3295,4220 3250,4175 3250,4125 ; R3.1 3365,1982.32 3360,1977.32 ; R9.1 3386.93,4116.93 3250,3980 ; C10.1 3514.33,1977.32 3360,1977.32 ; U2.2@3828.11,2580.08 U2.1 ; U3.1 U3.2@3974.96,3329.96 ; C1.1 4077.48,2707.01 4107.29,2736.82 4107.29,2742.29 4115,2750 ; C2.1 4177.52,2707.01 4134.53,2750 4115,2750 ; C26.1 4380.51,3800 4395.2,3814.69 4395.2,3815.67 4470,3890.47 4470,4000 4520,4050 5170,4050 5185,4035 5185,3715.86 5160,3690.86 ; R2.1 4385.98,2751.97 4549.02,2915 ; R4.1 4495,3975 4540,4020 5150,4020 5160,4010 5160,3690.86 ; C17.1 4660,3742.99 4660,3715.86 4665.86,3710 4795,3710 ; C3.2 4662.5,2779.35 4882.5,2779.35 ; C18.1 4795,3710 ; U3.2@4857.64,3597.68 4865,3605.04 4865,3685 ; U1.2@4887.64,2367.68 5237.68,2367.68 5355,2485 5355,2865 5305,2915 5018.15,2915 ; C19.1 4935,3745 4935,3710 ; C20.1 5060,3745 5060,3714.33 5055.67,3710 4935,3710 ; C4.2 5102.5,2779.35 4882.5,2779.35 ; U1.2@5173.07,2070.04 U1.2@5192.17,2089.14 ; U3.6 5174.96,3331.93 5143.07,3300.04 5175.55,3300.04 5240.51,3365 5310,3365 5325,3350 ; U1.6 5204.96,2101.93 U1.2@5192.17,2089.14 ; C21.1 5325,3350 ; C5.1 5344.14,2058.28 5344.14,2089.14 ; C6.1 5435,2090 5430,2095 ; C22.1 5460,3390 ; C8.1 5540,2090 5545,2095 ; C23.1 5580,3385 5575,3390 ; C7.1 5645,2090 5640,2095 ; C24.1 5715,3380.98 ; C9.1 5725.31,2033.74 5725.31,2064.69 5695,2095 5640,2095 ; C25.1 5835,3260.98 5715,3380.98 ; 2535,2425 2535,2530 ; 2535,2530 2535,2610 ; 2535,2610 2535,2645 ; 2973.15,2080 2895,2001.85 2895,1820.86 2900.86,1815 3107.26,1815 3269.59,1977.32 3360,1977.32 ; 3250,3980 3250,4125 ; 4115,2750 4280,2915 4549.02,2915 ; 4549.02,2915 5018.15,2915 ; 4795,3710 4865,3710 ; 4865,3685 4865,3710 ; 4865,3685 5154.14,3685 5160,3690.86 ; 4865,3710 4935,3710 ; 4882.5,2779.35 5018.15,2915 ; U1.2@5192.17,2089.14 5344.14,2089.14 ; 5325,3350 5365,3390 5460,3390 ; 5344.14,2089.14 5350,2095 5430,2095 ; 5430,2095 5545,2095 ; 5460,3390 5575,3390 ; 5545,2095 5640,2095 ; 5575,3390 5580,3390 5705.98,3390 5715,3380.98
  other v1: 3195,3085 3295,3085 3195,3150 3295,3150 3195,3215 3295,3215 3195,3280 3295,3280
NetC1_2: C1.2 C2.2 C3.1 C4.1 U1.3 U1.5 | length 1617.2
  Top Layer w10: C1.2 4063.47,2582.99 4079.14,2567.32 4079.14,2540.86 4085,2535 4159.14,2535 ; C2.2 4180.67,2582.99 4165,2567.32 4165,2540.86 4159.14,2535 ; C3.1 4880,2585 ; C4.1 5100,2585 4880,2585 ; 4159.14,2535 4159.14,2525.7 U1.3 4354.8,2330.04 4624.8,2330.04 U1.5 4692.56,2367.68 4745.04,2420.16 4745.04,2450.04 4880,2585
NetC10_2: C10.2 C11.1 U2.3 U2.5 | length 897.9
  Top Layer w10: C11.1 3170.63,1995.63 U2.5 3208.27,2350 3478.27,2350 U2.3 3533.23,2120.24 C10.2
NetC17_2: C17.2 C18.2 C19.2 C20.2 C26.2 U3.3 U3.5 | length 1888.9
  Top Layer w10: C26.2 4320.47,3665.63 U3.3 4324.8,3560.04 4594.8,3560.04 U3.5 4607.48,3597.68 4555,3650.16 4555,3954.14 4560.86,3960 4807.29,3960 4857.29,3910 ; C17.2 4655,3904.14 4660.86,3910 4790,3910 ; C18.2 4790,3879.02 4790,3910 ; C19.2 4924.57,3879.44 4924.57,3910 ; C20.2 5059.14,3879.87 5059.14,3910 4924.57,3910 ; 4790,3910 4857.29,3910 ; 4857.29,3910 4924.57,3910
NetC27_1: C27.1 R6.1 R8.2 U4.6 | length 1034.3
  Top Layer w10: C27.1 2690.43,3871.93 R6.1 ; R8.2 R6.1 ; U4.6 3150,3860 3138.07,3871.93 R6.1
NetC30_2: C30.2 U4.5 | length 509.3
  Top Layer w10: C30.2 3200,3951.63 U4.5
NetR1_1: R1.1 R2.2 | length 109.5
  Top Layer w10: R2.2 4390,2685.94 R1.1
NetR1_2: R1.2 U1.4 | length 182.9
  Top Layer w10: R1.2 4390,2485 U1.4
NetR3_2: R3.2 U2.4 | length 193.6
  Top Layer w10: U2.4 3353.27,2284.84 3353.27,2122.24 R3.2
NetR4_2: R4.2 U3.4 | length 172.4
  Top Layer w10: U3.4 4460,3736.93 4495,3771.93 R4.2
NetR5_2: R5.2 U4.2 | length 199
  Top Layer w10: U4.2 3350,3659.45 R5.2
NetR7_2: R7.2 R9.2 U4.3 | length 635.2
  Top Layer w10: U4.3 3310.59,3485.99 3310.59,3743.54 3411.9,3844.84 3416.38,3844.84 R7.2 3435,4045 R9.2
copper on no net:
  other v1: 3555,3030 3655,3030 2810,3040 2910,3040 2695,3630 3710,3640

## Polygon pours and split planes (outlines as drawn)
37V on Top Layer "Top Layer-37V" (solid, pour order 6): 3385,3430 3400,3445 3400,3825 3755,3825 3755,3805 3755,3425
24V on Top Layer "Top Layer-24V" (solid, pour order 14): 3115,3430 3115,3830 2645,3830 2625,3810 2630,3805 2630,3425
CO2 on Top Layer "Top Layer-CO2" (solid, pour order 2): 2710,3385 2710,2995 3760,2995 3760,3390

## Other copper
Top Layer:
  text "Vin (34V)" at 3565,3945 h60
  text "Vout (24V)" at 2060,3650 h60